# Altium PCB Main.PcbDoc
Units mil, origin at the board's own origin, x right, y up, seen from the top; angles counter-clockwise.
Board outline 2045 x 1510 mil, 2 copper layers (Top Layer, Bottom Layer); 52 components, 47 nets, 215 pads, 79 vias.
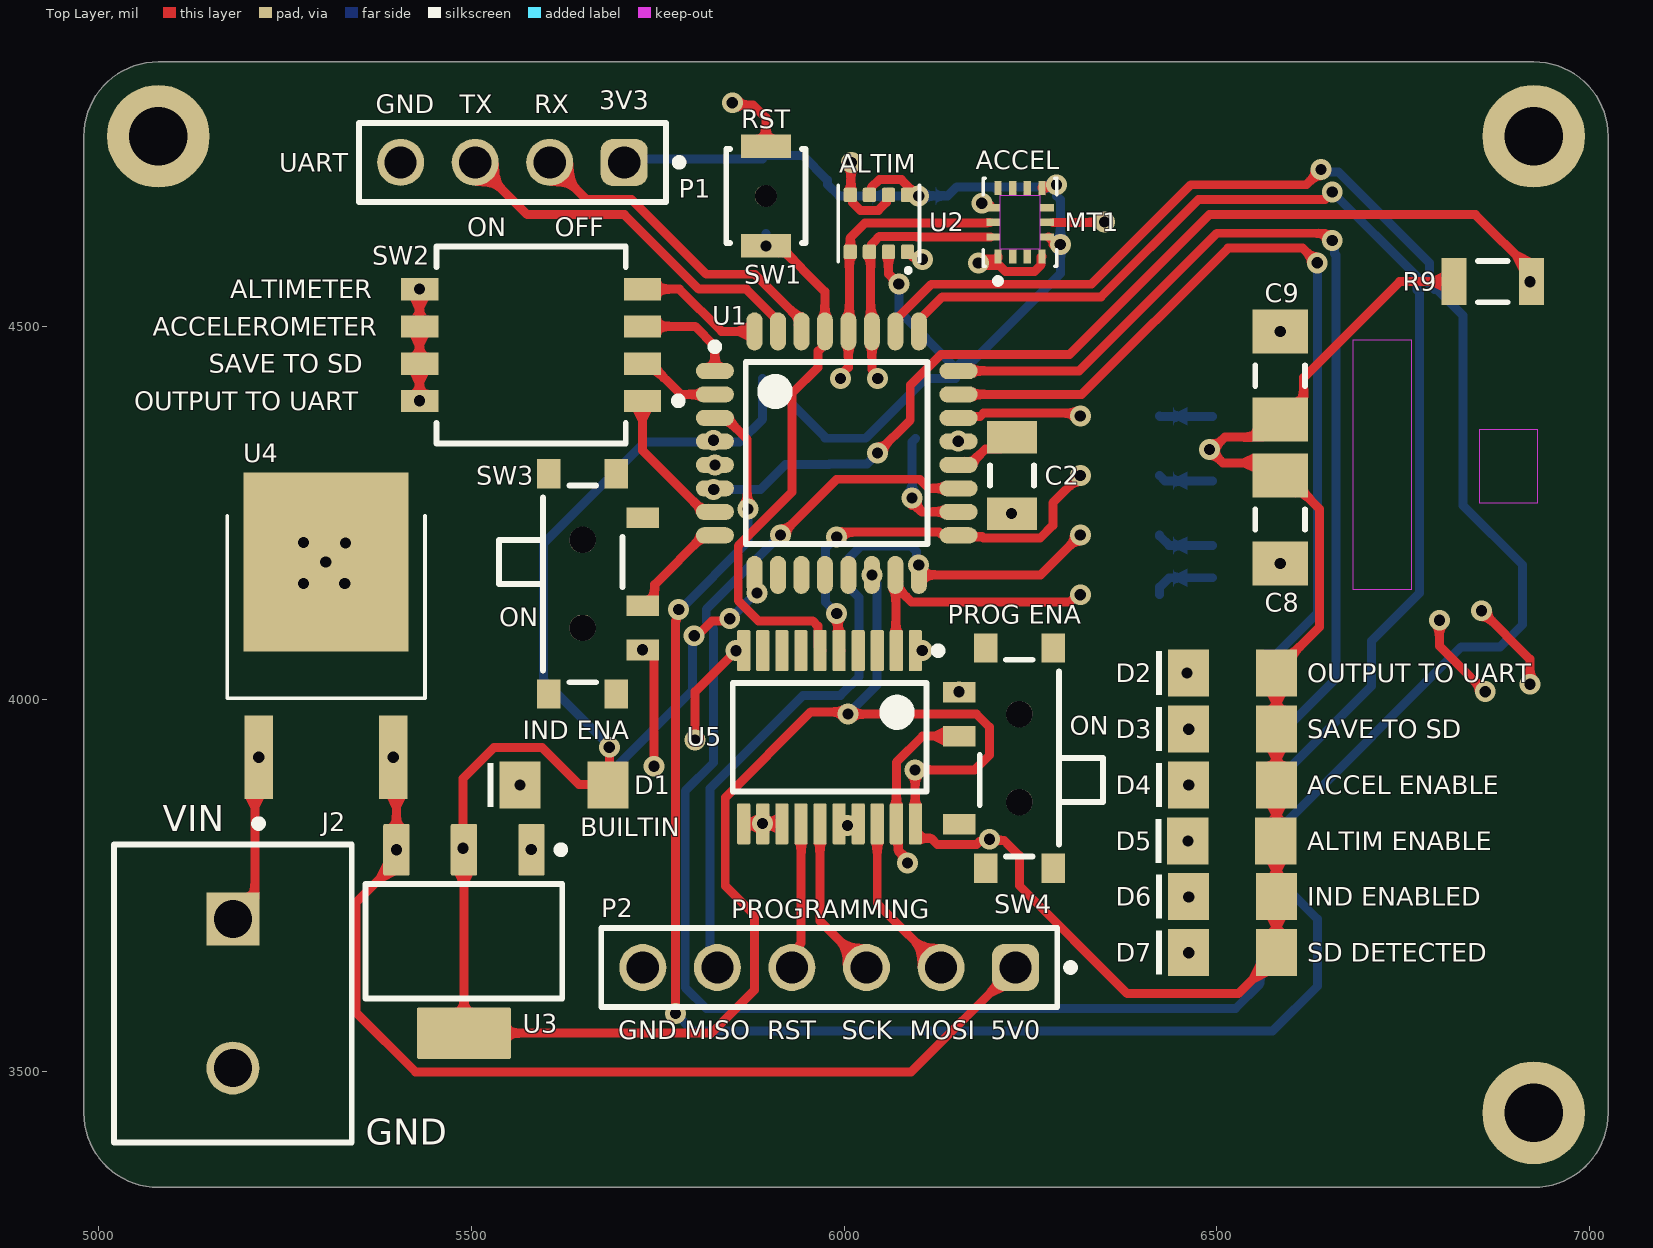
[diagram p0: Top Layer view]
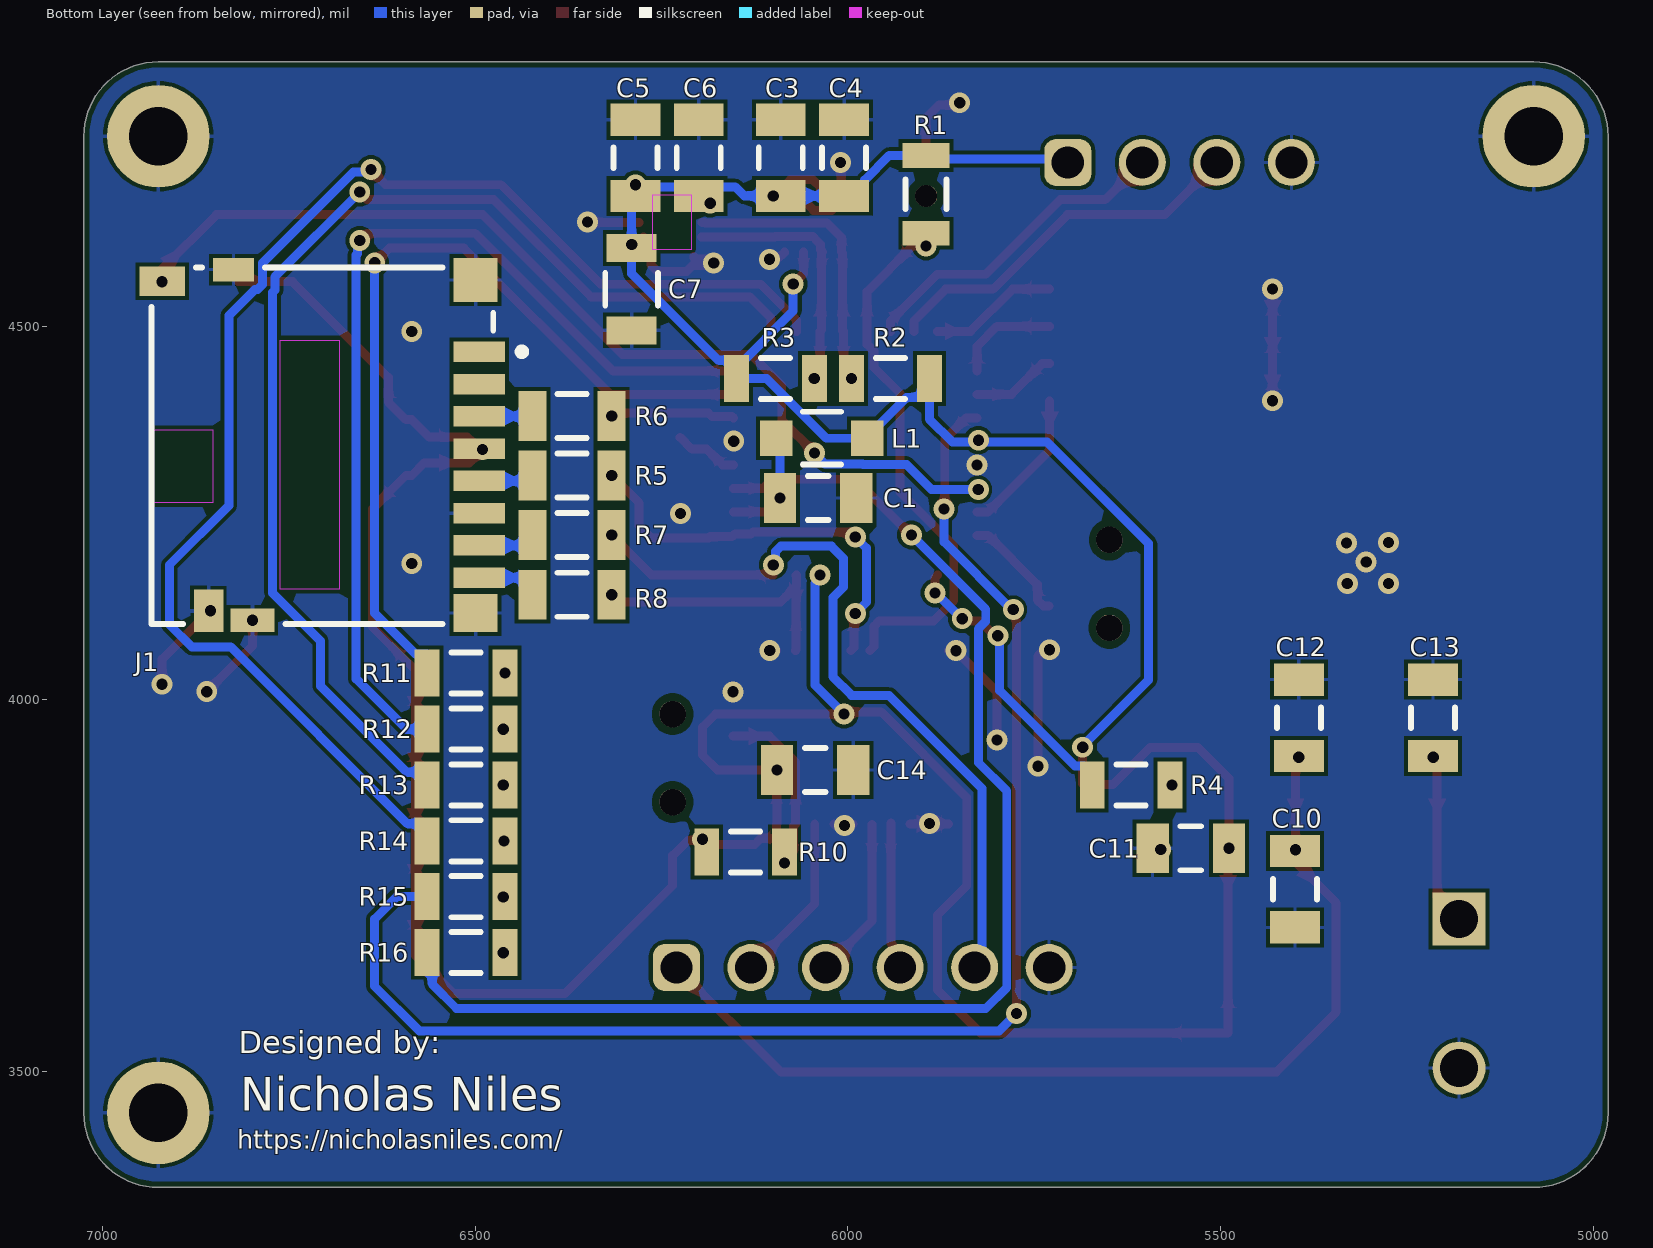
[diagram p1: Bottom Layer view, seen from below]
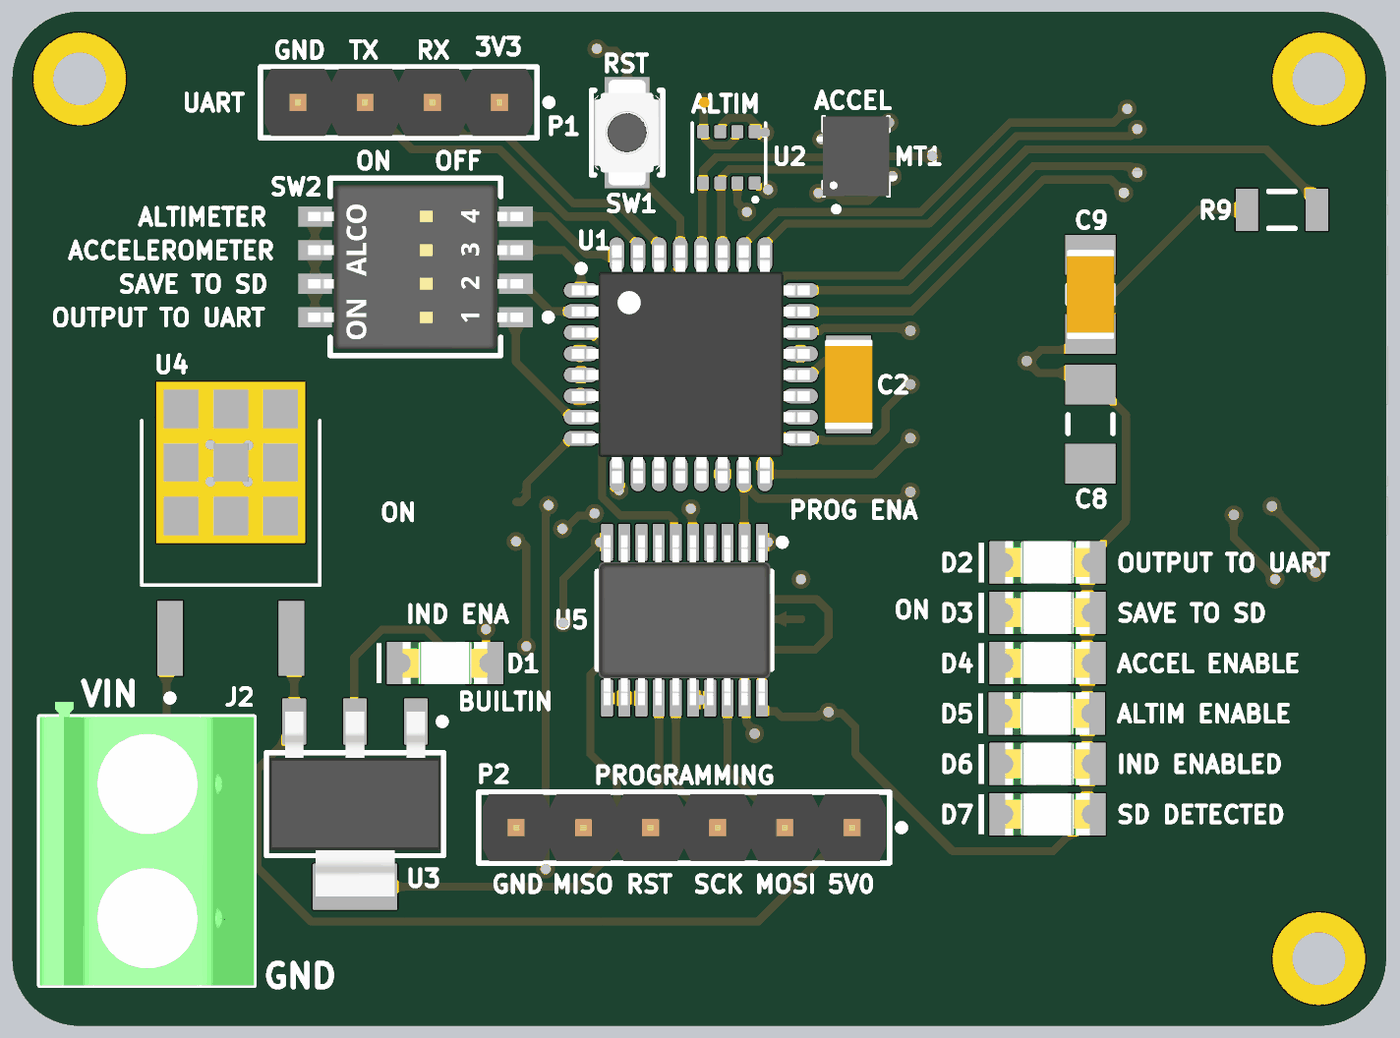
[diagram p2: 3D render of the assembled board from above, using the file's embedded part models]

## Layer stack, top to bottom
Top Solder: solder mask 0.4, Solder Resist, Dk 3.5
Top Layer: signal copper 1.4
Dielectric 1: dielectric 12.6, FR-4, Dk 4.8
Bottom Layer: signal copper 1.4
Bottom Solder: solder mask 0.4, Solder Resist, Dk 3.5

## Board outline
4980,3445 4980,4755 cw(c5080,4755) 5080,4855 6925,4855 cw(c6925,4755) 7025,4755 7025,3445 cw(c6925,3445) 6925,3345 5080,3345 cw(c5080,3445)

## Design rules (kind name [scope] priority, off if disabled: settings)
BoardOutlineClearance [All] p1: gap=7.87 ignorepadtopadclearanceinfootprint=FALSE
Clearance [All] p1: gap=5 ignorepadtopadclearanceinfootprint=TRUE except(10: Arc-Hole Track-Hole SMDPad-Hole THPad-Hole Via-Hole Fill-Hole Poly-Hole Region-Hole Text-Hole)
ComponentClearance [All] p1: gap=5 collisioncheckmode=3 verticalgap=5 showdistances=TRUE
DiffPairsRouting [All] p1: maxlimit=10 minlimit=5 mostfreqgap=5 toplayer_minwidth=5 toplayer_maxwidth=1000 toplayer_prefwidth=5 bottomlayer_minwidth=5 bottomlayer_maxwidth=1000 bottomlayer_prefwidth=5 maxuncoupledlength=500
Height [All] p1: minheight=0 maxheight=71497.94 prefheight=500
HoleSize [All] p1: absolutevalues=TRUE maxlimit=248.03 minlimit=11.81 maxpercent=80.000 minpercent=20.000
HoleToHoleClearance [All] p1: gap=10 allowstackedmicrovias=FALSE
MinimumAnnularRing [All] p1: minimumring=6
MinimumSolderMaskSliver [All] p1: minsoldermaskwidth=6
PlaneClearance [All] p1: clearance=5
PlaneConnect PlaneConnectPowerPads [InPadClass('PowerPads')] p1: planeconnectstyle=Direct reliefexpansion=20 reliefentries=4 reliefconductorwidth=10 reliefairgap=10
PlaneConnect [All] p2: pad.planeconnectstyle=Relief pad.reliefexpansion=11.81 pad.reliefentries=4 pad.reliefconductorwidth=5 pad.reliefairgap=5 via.planeconnectstyle=Direct via.reliefexpansion=11.81 via.reliefentries=4 via.reliefconductorwidth=5 via.reliefairgap=5
PolygonConnect PolygonConnectPowerPads [All vs (InPadClass('PowerPads'))] p1: connectstyle=Direct reliefconductorwidth=10 reliefentries=4 polygonreliefangle="90 Angle" airgapwidth=10
PolygonConnect [All] p2: thpad.connectstyle=Relief thpad.reliefconductorwidth=5 thpad.reliefentries=4 thpad.polygonreliefangle="90 Angle" thpad.airgapwidth=5 smdpad.connectstyle=Relief smdpad.reliefconductorwidth=5 smdpad.reliefentries=4 smdpad.polygonreliefangle="90 Angle" smdpad.airgapwidth=5 via.connectstyle=Direct via.reliefconductorwidth=5 via.reliefentries=4 via.polygonreliefangle="90 Angle" via.airgapwidth=5
RoutingVias [All] p1: holewidth=11.81 width=23.62 viastyle="Through Hole" minholewidth=11.81 minwidth=23.62 maxholewidth=23.62 maxwidth=259.84
SilkToSilkClearance [All] p1: silktosilkclearance=5
SilkToSolderMaskClearance [IsPad] p1: minsilkscreentomaskgap=5 clearancetoexposedcopper=TRUE
SolderMaskExpansion [All] p1: expansion=2 istentingtop=FALSE
SupplyNets "Schematic Supply Nets_2" [InNet('5V0')] p1: voltage=0.000
SupplyNets "Schematic Supply Nets_3" [InNet('VIN')] p2: voltage=0.000
SupplyNets "Schematic Supply Nets_1" [InNet('3V3')] p3: voltage=0.000
SupplyNets "Schematic Supply Nets" [InNet('GND')] p4: voltage=0.000
UnRoutedNet [All] p1: checkbadconnections=TRUE
Width Width_10mil [All] p1: maxlimit=1000 minlimit=12 preferedwidth=12 minimp=50.000000 maximp=50.000000 favimp=50.000000
Width Width_6mil [All] p2: maxlimit=1000 minlimit=6 preferedwidth=6 minimp=50.000000 maximp=50.000000 favimp=50.000000
Width Power_20mil [All] p3: maxlimit=1000 minlimit=20 preferedwidth=20 minimp=50.000000 maximp=50.000000 favimp=50.000000
Width Power_12mil [All] p4: maxlimit=1000 minlimit=12 preferedwidth=12 minimp=50.000000 maximp=50.000000 favimp=50.000000
Width Width_5mil [All] p5: maxlimit=1000 minlimit=5 preferedwidth=5 minimp=50.000000 maximp=50.000000 favimp=50.000000
19 further rules are at their usual default settings.

## Classes and differential pairs
component class Power: C10 C11 C12 C13 J2 U3 U4
component class Indicators: D2 D4 D6 D7 R14 R16
component class Config: SW2 SW3 SW4
component class MicroSD: C8 C9 J1 R6 R8 R10
component class Microcontroller: C1 C2 D2 L1 P1 R1 R2 R3 R6 SW1 U1
component class LevelShifter: C14 P2 R10 U5
component class Altimeter: C3 C4 U2
component class Accelerometer: C5 C6 C7 MT1

## Components (designator, comment, footprint, x,y, rotation, side; value= is the part's Value field where it differs from the comment)
C1 "0.1µF" CAPC3216X100X50LL20T25 6040,4270 r0 bottom
C2 "0.1µF" CAPC3216X100X50LL20T25 6225,4300 r270 top
C3 "0.1µF" CAPC3216X100X50LL20T25 6090,4726.18 r90 bottom
C4 "0.1µF" CAPC3216X100X50LL20T25 6005,4726.18 r90 bottom
C5 "2.2µF" CAPC3216X180X50LL20T25 6285,4726.18 r270 bottom
C6 "0.1µF" CAPC3216X100X50LL20T25 6200,4726.18 r270 bottom
C7 "10nF" FP-C1206C-EB-MFG 6290,4549.88 r270 bottom value="10,000 pF"
C8 "10µF" CAPC3216X180X50ML20T25 6585,4240.94 r90 top
C9 "0.1µF" CAPC3216X100X50ML20T25 6585,4434.06 r270 top
C10 "1µF" CAPC3216X110X50LL20T25 5400,3745 r90 bottom
C11 "1µF" CAPC3216X110X50LL20T25 5540,3800 r180 bottom
C12 "1µF" CAPC3216X110X50LL20T25 5395,3975 r270 bottom
C13 "1µF" CAPC3216X110X50LL20T25 5215,3975 r270 bottom
C14 "0.1µF" CAPC3216X100X50LL20T25 6043.82,3905 r180 bottom
D1 "150120GS75000" WL-SMCW_1206_150120xx75000 5624.06,3885 r0 top
D2 "150120GS75000" WL-SMCW_1206_150120xx75000 6520.94,4035 r0 top
D3 "150120GS75000" WL-SMCW_1206_150120xx75000 6520.94,3960 r0 top
D4 "150120GS75000" WL-SMCW_1206_150120xx75000 6520.94,3885 r0 top
D5 "150120GS75000" WL-SMCW_1206_150120xx75000 6520,3810 r0 top
D6 "150120GS75000" WL-SMCW_1206_150120xx75000 6520.94,3735 r0 top
D7 "150120GS75000" WL-SMCW_1206_150120xx75000 6520.94,3660 r0 top
J1 "DM3D-SF" FP-DM3D-SF-MFG 6705,4340 r90 bottom
J2 "1729128" PHOE-1729128-2_V 5180,3605 r270 top
L1 "10µH" WE-MI_1206_L3.2W1.6H1.1 6035,4350 r180 bottom
MT1 "ICM-42670-P" XDCR_ICM-42670-P 6235.93,4639.69 r90 top
P1 "61300411121" 61300411121 5555,4720 r180 top
P2 "61300611121" 61300611121 5980,3640 r180 top
R1 "10kΩ" RESC3116X65X40LL10T20 5895,4677.17 r90 bottom
R2 "10kΩ" RESC3116X65X40LL10T20 5942.83,4430 r180 bottom
R3 "10kΩ" RESC3116X65X40LL10T20 6097.17,4430 r0 bottom
R4 "1kΩ" RESC3116X65X40LL10T20 5620,3885 r180 bottom
R5 "33Ω" RESC1206(3216)_L 6370,4300 r180 bottom value="33.00 Ohm"
R6 "33Ω" RESC1206(3216)_L 6370,4380 r180 bottom value="33.00 Ohm"
R7 "33Ω" RESC1206(3216)_L 6370,4220 r180 bottom value="33.00 Ohm"
R8 "33Ω" RESC1206(3216)_L 6370,4140 r180 bottom value="33.00 Ohm"
R9 "10kΩ" RESC3116X65X40LL10T20 6870,4560 r180 top
R10 "10kΩ" RESC3116X65X40LL10T20 6137.17,3795 r0 bottom
R11 "1kΩ" RESC3116X65X40LL10T20 6512.17,4035 r180 bottom
R12 "1kΩ" RESC3116X65X40LL10T20 6512.17,3960 r180 bottom
R13 "1kΩ" RESC3116X65X40LL10T20 6512.17,3885 r180 bottom
R14 "1kΩ" RESC3116X65X40LL10T20 6512.17,3810 r180 bottom
R15 "1kΩ" RESC3116X65X40LL10T20 6512.17,3735 r180 bottom
R16 "1kΩ" RESC3116X65X40LL10T20 6512.17,3660 r180 bottom
SW1 "RST" FP-B3U-1000P-B-MFG 5895,4675 r90 top
SW2 "1571983-4" FP-1571983-4-MFG 5580,4475 r90 top
SW3 "450404015514" 450404015514 -44350.71,54154.53 r90 top
SW4 "450404015514" 450404015514 56235,-46079.06 r270 top
U1 "ATMEGA328PB-AU" ATML-32A_L 5990,4330 r0 top
U2 "BME280" PSON65P250X250X100-8N 6046.61,4638.19 r270 top
U3 "TLV1117LV33DCYR" DCY0004A_N 5490,3675 r270 top
U4 "VIN->5V0" DPAK229P990X238-4N 5305,4085 r0 top
U5 "SN74LVC245APWRG3" PW0020A_N 5980.43,3948.86 r270 top

## Footprints (in the part's own frame and the unit in brackets; to place one, negate y for a bottom-side part, rotate by r counter-clockwise, add the part's x,y. Pads: shape width x height; smd on the part's side, far side on the other; paste and mask are expansions set on the pad)
61300411121 [mm] "Pin Header, pitch 2.54 mm, THT, Vertical, single row, 4p"
  rrect50% 1.6x1.6 hole 1.1: 1(-3.81,0)
  round 1.6 hole 1.1: 2(-1.27,0) 3(1.27,0) 4(3.81,0)
  silkscreen extent -5.8,-1.35 5.23,1.35, body extent -5.08,-1.27 5.08,1.27, height 8.57
61300611121 [mm] "Pin Header, pitch 2.54 mm, THT, Vertical, single row, 6p"
  rrect50% 1.6x1.6 hole 1.1: 1(-6.35,0)
  round 1.6 hole 1.1: 2(-3.81,0) 3(-1.27,0) 4(1.27,0) 5(3.81,0) 6(6.35,0)
  silkscreen extent -8.34,-1.35 7.77,1.35, body extent -7.62,-1.27 7.62,1.27, height 8.57
450404015514 [mm] "Right angle Slide Switch"
  rect 0.7x1.1 smd: COM(-1270.75,-1272.05) L1(-1267.75,-1272.05) L2(-1272.25,-1272.05)
  round 0.9 hole 0.9 unplated: M1(-1271.5,-1270) M2(-1268.5,-1270)
  rect 1x0.8 smd: M3(-1273.75,-1268.85) M4(-1266.25,-1268.85) M5(-1273.75,-1271.15) M6(-1266.25,-1271.15)
  silkscreen extent -1273.35,-1271.35 -1266.65,-1267.15, body extent -1273.85,-1272.25 -1266.15,-1267.12, height 1.4
ATML-32A_L [mm] "TQFP, 32-Leads, Body 7x7mm, Pitch 0.8mm, IPC High Density"
  oval 1.3x0.55 smd: 1(-4.15,2.8) 2(-4.15,2) 3(-4.15,1.2) 4(-4.15,0.4) 5(-4.15,-0.4) 6(-4.15,-1.2) 7(-4.15,-2) 8(-4.15,-2.8) 17(4.15,-2.8) 18(4.15,-2) 19(4.15,-1.2) 20(4.15,-0.4) 21(4.15,0.4) 22(4.15,1.2) 23(4.15,2) 24(4.15,2.8)
  oval 0.55x1.3 smd: 9(-2.8,-4.15) 10(-2,-4.15) 11(-1.2,-4.15) 12(-0.4,-4.15) 13(0.4,-4.15) 14(1.2,-4.15) 15(2,-4.15) 16(2.8,-4.15) 25(2.8,4.15) 26(2,4.15) 27(1.2,4.15) 28(0.4,4.15) 29(-0.4,4.15) 30(-1.2,4.15) 31(-2,4.15) 32(-2.8,4.15)
  silkscreen extent -4.27,-3.1 3.1,3.75, body extent -4.5,-4.5 4.5,4.5, height 1.2
CAPC3216X100X50LL20T25 [mm] "Chip Capacitor, 2-Leads, Body 3.4x1.8mm, IPC High Density"
  rect 1.1x1.7 smd: 1(-1.3,0) 2(1.3,0)
  silkscreen extent -0.35,-0.75 0.35,0.75, body extent -1.7,-0.9 1.7,0.9, height 1
CAPC3216X100X50ML20T25 [mm] "Chip Capacitor, 2-Leads, Body 3.4x1.8mm, IPC Low Density"
  rect 1.5x1.9 smd: 1(-1.5,0) 2(1.5,0)
  silkscreen extent -0.35,-0.85 0.35,0.85, body extent -1.7,-0.9 1.7,0.9, height 1
CAPC3216X110X50LL20T25 [mm] "Chip Capacitor, 2-Leads, Body 3.20x1.60mm, IPC High Density"
  rect 1.1x1.7 smd: 1(-1.3,0) 2(1.3,0)
  silkscreen extent -0.35,-0.75 0.35,0.75, body extent -1.7,-0.9 1.7,0.9, height 1.1
CAPC3216X180X50LL20T25 [mm] "Chip Capacitor, 2-Leads, Body 3.20x1.60mm, IPC High Density"
  rect 1.1x1.7 smd: 1(-1.3,0) 2(1.3,0)
  silkscreen extent -0.35,-0.75 0.35,0.75, body extent -1.7,-0.9 1.7,0.9, height 1.8
CAPC3216X180X50ML20T25 [mm] "Chip Capacitor, 2-Leads, Body 3.40x1.80mm, IPC Low Density"
  rect 1.5x1.9 smd: 1(-1.5,0) 2(1.5,0)
  silkscreen extent -0.35,-0.85 0.35,0.85, body extent -1.7,-0.9 1.7,0.9, height 1.8
DCY0004A_N [mm] "SOT223, 4-Leads, Body 6.7x3.7mm, Pitch 2.3mm, IPC Medium Density"
  rrect11% 1.75x0.9 smd: 1(-3.125,2.3) 2(-3.125,0) 3(-3.125,-2.3)
  rrect6% 1.75x3.2 smd: 4(3.125,0)
  silkscreen extent -3.25,-3.35 1.95,3.43, body extent -3.5,-3.25 3.5,3.25, height 1.62
DPAK229P990X238-4N [mm]
  rect 0.97x2.83 smd: 1(-2.29,-4.14) 3(2.29,-4.14)
  rect 5.63x6.09 smd paste-4: 2(0,2.51)
  silkscreen extent -3.37,-6.5 3.37,4.09
FP-1571983-4-MFG [mm]
  rect 0.76x1.27 smd paste+0 mask+0: 1(-1.905,-3.795) 2(-0.635,-3.795) 3(0.635,-3.795) 4(1.905,-3.795) 5(1.905,3.795) 6(0.635,3.795) 7(-0.635,3.795) 8(-1.905,3.795)
  silkscreen extent -3.35,-5.15 3.35,3.22, body extent -3.45,-4.53 3.45,4.53, height 0.25
FP-B3U-1000P-B-MFG [mm]
  rect 0.8x1.7 smd paste+0 mask+0: 1(-1.7,0) 2(1.7,0)
  round 0.75 hole 0.75 unplated paste-2539.97 mask+0: ""(0,0)
  silkscreen extent -1.6,-1.35 1.6,1.35, body extent -2.2,-1.45 2.2,1.45, height 0.25
FP-C1206C-EB-MFG [mm]
  rect 0.95x1.7 smd paste+0 mask+0: 1(-1.4,0) 2(1.4,0)
  silkscreen extent -0.55,-0.9 0.55,0.9, body extent -1.6,-0.8 1.6,0.8, height 0.88
FP-DM3D-SF-MFG [mm]
  rect 0.7x1.75 smd paste+0 mask+0: 1(3.2,-5.35) 2(2.1,-5.35) 3(1,-5.35) 4(-0.1,-5.35) 5(-1.2,-5.35) 6(-2.3,-5.35) 7(-3.4,-5.35) 8(-4.5,-5.35)
  rect 1x1.55 smd paste+0 mask+0: 9(5.6,5.45)
  rect 1.45x1 smd paste+0 mask+0: 10(-5.625,3.875)
  rect 0.8x1.4 smd paste+0 mask+0: 11(6,3.025)
  rect 0.8x1.5 smd paste+0 mask+0: 12(-5.95,2.375)
  rect 1.3x1.5 smd paste+0 mask+0: 13(-5.7,-5.225)
  rect 1.5x1.5 smd paste+0 mask+0: 14(5.65,-5.225)
  Keep-Out Layer region: -4.9,1.425 3.6,1.425 3.6,-0.575 -4.9,-0.575
  Keep-Out Layer region: -1.952,5.726 0.548,5.726 0.548,3.726 -1.952,3.726
  silkscreen extent -6.07,-6.92 6.07,5.82, body extent -6.72,-5.91 7.08,8.19, height 1.95
PHOE-1729128-2_V [mm] "Receptacle, 2-Leads, Body 8.1x10.16mm, Pitch 5.08mm"
  rect 1.8x1.8 hole 1.3: 1(-2.54,0)
  round 1.8 hole 1.3: 2(2.54,0)
  silkscreen extent -5.08,-4.05 5.08,4.05, body extent -5.65,-4.05 5.08,4.05, height 10.01
PSON65P250X250X100-8N [mm]
  rrect25% 0.49x0.45 smd: 1(0.97,0.975) 2(0.97,0.325) 3(0.97,-0.325) 4(0.97,-0.975) 5(-0.97,-0.975) 6(-0.97,-0.325) 7(-0.97,0.325) 8(-0.97,0.975)
  silkscreen extent -1.3,-1.39 1.65,1.39
PW0020A_N [mm] "SOP, 20-Leads, Body 6.6x4.5mm, Pitch 0.65mm, IPC Medium Density"
  rrect22% 1.4x0.45 smd: 1(-2.95,2.925) 2(-2.95,2.275) 3(-2.95,1.625) 4(-2.95,0.975) 5(-2.95,0.325) 6(-2.95,-0.325) 7(-2.95,-0.975) 8(-2.95,-1.625) 9(-2.95,-2.275) 10(-2.95,-2.925) 11(2.95,-2.925) 12(2.95,-2.275) 13(2.95,-1.625) 14(2.95,-0.975) 15(2.95,-0.325) 16(2.95,0.325) 17(2.95,0.975) 18(2.95,1.625) 19(2.95,2.275) 20(2.95,2.925)
  silkscreen extent -3.07,-3.3 1.85,3.83, body extent -3.21,-3.25 3.21,3.25, height 1
RESC1206(3216)_L [mm] "Chip Resistor, Body 3.2x1.6mm, IPC High Density"
  rect 0.95x1.7 smd: 1(-1.35,0) 2(1.35,0)
  silkscreen extent -0.5,-0.75 0.5,0.75, body extent -1.67,-0.87 1.67,0.87, height 0.75
RESC3116X65X40LL10T20 [mm] "Chip Resistor, 2-Leads, Body 3.10x1.60mm, IPC High Density"
  rect 0.85x1.6 smd: 1(-1.325,0) 2(1.325,0)
  silkscreen extent -0.5,-0.7 0.5,0.7, body extent -1.6,-0.85 1.6,0.85, height 0.65
WE-MI_1206_L3.2W1.6H1.1 [mm] "SMD Multilayer Inductor, body 3.2x1.6mm"
  rect 1.1x1.2 smd: 1(-1.55,0) 2(1.55,0)
  silkscreen extent -0.65,-0.9 0.65,0.9, body extent -1.6,-0.8 1.6,0.8, height 1.1
WL-SMCW_1206_150120xx75000 [mm] "SMD Mono-color Chip LED, body 3.2x1.6mm"
  rect 1.4x1.6 smd: 1(-1.5,0) 2(1.5,0)
  silkscreen extent -2.6,-0.75 -2.4,0.75, body extent -1.6,-0.8 1.6,0.8, height 0.68
XDCR_ICM-42670-P [mm]
  rect 0.475x0.25 smd paste-1 mask+0.05: 1(-1.162,0.75) 2(-1.162,0.25) 3(-1.162,-0.25) 4(-1.162,-0.75) 8(1.162,-0.75) 9(1.162,-0.25) 10(1.162,0.25) 11(1.162,0.75)
  rect 0.25x0.475 smd paste-1 mask+0.05: 5(-0.5,-0.913) 6(0,-0.913) 7(0.5,-0.913) 12(0.5,0.913) 13(0,0.913) 14(-0.5,0.913)
  Keep-Out Layer region: 0.925,-0.675 -0.925,-0.675 -0.925,0.675 0.925,0.675
  silkscreen extent -2.1,-1.25 1.5,1.25, body extent -1.5,-1.25 1.5,1.25, height 0.81

## Part data
C1 C2 C3 C4 C6 C9 C14: library part CMP-1664-00001-4, "Chip Capacitor, 100 nF, +/- 10%, 25 V, -55 to 125 degC, 1206 (3216 Metric), RoHS, Tape and Reel", Manufacturer=Kemet, Max Operating Temperature="125 degC", Min Operating Temperature="-55 degC", Package Quantity=4000, Voltage Rating="25 V", ComponentLink1Description="Manufacturer URL", ComponentLink1URL=http://www.kemet.com/, ComponentLink2Description=Datasheet, ComponentLink2URL=http://www.kemet.com/docfinder?Partnumber=C1206F104K3RACTU, DatasheetVersion=02/2016, Height="0.78 mm", Length="3.2 mm", Mounting Technology="Surface Mount", PackageDescription="2-Pin Surface Mount Device, Body 3.2 x 1.6 mm", PackageReference=1206, Packaging="Tape and Reel", REACH SVHC="No SVHC", RoHSCompliant=true
C5: library part CMP-1037-04831-2, "Chip Capacitor, 2.2 uF, +/- 10%, 50 V, -55 to 125 degC, 1206 (3216 Metric), RoHS, Tape and Reel", Capacitance=2.2uF, Capacitance - nF=2200nF, Case Code - in=1206, Case Code - mm=3216, Case Height=1.6mm, Case Length=3.2mm, Dielectric=X7R, Manufacturer=Kemet, Maximum Operating Temperature=+125C, Minimum Operating Temperature=-55C, Operating Temperature Range=-55Cto+125C, Package / Case=1206(3216metric), Package Description="2-Pin Surface Mount Device, Body 3.2 x 1.6 mm", Temperature Coefficient / Code=+/-15%, Tolerance=10%, Voltage Rating=50V, Brand=Kemet, Case Width=1.6mm, Class=Class1, Datasheet URL=http://www.kemet.com/docfinder?Partnumber=C1206C225K5RACTU, Datasheet Version=02/2016, Dimensions=1.6mmWx3.2mmLx1.6mmH, Factory Pack Quantity=2000, Manufacturer URL=http://www.kemet.com/, Mounting Technology=SurfaceMount, Package Reference=1206, Packaging=Reel, Product=GeneralTypeMLCCs, Product Category=MultilayerCeramicCapacitorsMLCC-SMD/SMT, RoHS=Details, Series=C1206C, Termination Style=SMD/SMT, Type=SMDMLCCX7R6.3-250VDCCommericalGrade, Voltage Rating DC=50V
C7: library part CMP-03020-003656-1, "CAP CER 10000PF 100V X7R 1206", Capacitance="10,000 pF", Manufacturer=KEMET, Manufacturer Part Number=C1206C103J1RACTU, Package=C1206C-EB, Temperature="-55°C to +150°C", Temperature Characteristic=X7R, Temperature Coefficient=15%, Temperature Range High=+150°C, Temperature Range Low=-55°C, Tolerance=0.05, Voltage Rating="100 V", Automotive=Yes, Automotive Grade="Grade 0", Category=Cap, ComponentLink2Description=Datasheet, ComponentLink2URL=https://content.kemet.com/datasheets/KEM_C1007_X8R_ULTRA_150C_SMD.pdf, Device Class L1="Passive Components", Device Class L2=Capacitors, Device Class L3="Ceramic Capacitors", Digikey Description="CAP CER 10000PF 100V X7R 1206", Height=0.88mm, Ipc Land Pattern Name=CAPC320160X78, Lead Free=Yes, Material=Ceramic, Mouser Description="1206 C 10nF Ceramic Multilayer Capacitor, 100 VDC, +125degC, X7R Dielec, +/-5%", Octopart=https://octopart.com/c1206c103j1ractu-kemet-121270, RoHS=TRUE
C8: library part CMP-1664-00006-1, "CAP, Ceramic, 10 uF, +/- 10%, 16 V, -55 to 125 degC, 1206 (3216 Metric), RoHS, Tape and Reel", Capacitance="8.2 pF", Case Code (Imperial)=0603, Case Code (Metric)=1608, Max Operating Temperature="125 degC", Min Operating Temperature="-55 degC", Package Quantity=4000, Tolerance=5%, Type (Capacitors)=C0G, Voltage Rating="50 V", Case\Package=0603, ComponentLink1Description="Manufacturer URL", ComponentLink1URL=http://www.kemet.com/, ComponentLink2Description=Datasheet, ComponentLink2URL=http://capacitoredge.kemet.com/capedge2/DataSheet/Datasheet-C1206C106K4RACTU.pdf?pn=C1206C106K4RACTU, DatasheetVersion=Aug-16, Height="0.8 mm", Length="1.6 mm", Mount="Surface Mount", PackageDescription="2-Pin Surface Mount Device, Body 3.2 x 1.6 mm", PackageReference=1206, Packaging="Tape and Reel", Pins=2, Radiation Hardening=No, REACH SVHC="No SVHC", RoHSCompliant=true, Voltage Rating (DC)="50 V", Width="0.8 mm"
C10 C11 C12 C13: library part CMP-2000-06011-1, "Chip Capacitor, 1 uF, +/- 10%, 50 V, -55 to 125 degC, 1206 (3216 Metric), RoHS, Tape and Reel", Capacitance=1uF, Capacitance - nF=1000nF, Case Code - in=1206, Case Code - mm=3216, Case Height=1mm, Case Length=3.2mm, Case Width=1.6mm, Dielectric=X7R, Manufacturer=Kemet, Maximum Operating Temperature=+125C, Minimum Operating Temperature=-55C, Operating Temperature Range=-55Cto+125C, Package / Case=1206(3216metric), Package Description="2-Pin Surface Mount Device, Body 3.2 x 1.6 mm", Temperature Coefficient / Code=+/-15%, Tolerance=10%, Voltage Rating=50V, Brand=Kemet, Class=Class1, Datasheet URL=http://www.kemet.com/docfinder?Partnumber=C1206C105K5RACTU, Datasheet Version=02/2016, Dimensions=1.6mmWx3.2mmLx1mmH, Factory Pack Quantity=2500, Manufacturer URL=http://www.kemet.com/, Mounting Technology=SurfaceMount, Package Reference=1206, Packaging=Reel, Product=GeneralTypeMLCCs, Product Category=MultilayerCeramicCapacitorsMLCC-SMD/SMT, RoHS=Details, Series=C1206C, Termination Style=SMD/SMT, Type=SMDMLCCX7R6.3-250VDCCommericalGrade, Voltage Rating DC=50V
D1 D2 D3 D4 D5 D6 D7: library part CMP-1426-00014-4, "WL-SMCW SMT Mono-Color Chip LED Waterclear", Case Code (Imperial)=1206, Case Code (Metric)=3216, Color=Green, Forward Current=100mA, Forward Voltage=3.2V, Max Junction Temperature (Tj)=95°C, Max Operating Temperature=85°C, Max Reverse Voltage (DC)=5V, Min Operating Temperature=-40°C, Power Dissipation=105mW, Test Current=20mA, Case/Package=1206, Dominant Wavelength=525nm, Height=680µm, Length=3.2mm, Lens Style="Clear, Rectangular", Luminous Intensity=450mcd, Mount="Surface Mount", Packaging="Tape and Reel", Peak Wavelength=515nm, REACH SVHC=Unknown, Reverse Voltage=5V, RoHS=Compliant, Viewing Angle=140°, Wavelength=525nm, Width=1.6mm
J1: library part CMP-2000-06166-2, "CONN MICRO SD CARD PUSH-PULL", Contact Resistance=100mR, Current Rating=500mA, Flammability Rating="UL94 V-0", Insulation Resistance=1GR, Max Operating Temperature=85°C, Max Voltage Rating (AC)=125V, Min Operating Temperature=-25°C, Package Quantity=1, Connector Type=Connector, Contact Material="Copper Alloy", Contact Plating=Gold, Depth=11.45mm, Gender=Female, Housing Material=Polymer, Lead Free="Lead Free", Length=11.95mm, Max Current Rating=500mA, Mount="Surface Mount", Number Of Contacts=8, Number of Rows=1, Orientation="Right Angle", Packaging="Tape and Reel", Pitch=1.1mm, Radiation Hardening=No, REACH SVHC="No SVHC", Termination=Solder, Voltage Rating (AC)=125V, Width=11.95mm
J2: library part CMP-2000-05815-1, "PCB Terminal Block, 13.5 A, 400 V, 2-Pin THD, RoHS, Bulk", Current Rating=13500mA, Manufacturer="Phoenix Contact", Package Description="2-Pin Through Hole Device, Body 8.1 x 10.16 mm, Pitch 5.08 mm", Package Reference=1729128-2, Package Version=03/2015, Voltage Rating=400V, Datasheet URL=https://datasheet.ciiva.com/16046/1729128-16046181.pdf, Datasheet Version=12/2013, Manufacturer URL=http://www.phoenixcontact.com/, Mounting Technology=ThroughHole, No. of Positions=2, No. of Rows=1, Orientation=Horizontal, Package URL=https://www.phoenixcontact.com/online/portal/pi/pxc/product_detail_page/!ut/p/b1/3VdJjqNKFDxLH8AFycySyWY2ozFsEPOMMQaDOX1XedGL_1Vdm5YXJleknhSKeBkvI6EA8ncAo3AYoDhBQGco6KN7VURTdemj9us_IEKEZo_YHiPAEWEFmDGOHMORkqKYCORBZxgL7ZoaZYcbFFUZ3fqxSY6GOuxydWUuHqz1ynmMFygu583Bob0Ewr6Sd_l-5m-kAueHiB0jpRwZwe58wwtkpxtMYd_LmGcDRU02dRNEyWt6Y2ti5pSyJ_reIkzIulrqApdnbT11V5jnCKbYNCvhEM1MCpPByat_X379-iThf08CI5GfOPqfBeS3BRoBOdD55AKVv0iLwCMq-2BrzXWSGRH7pUGD9uwXQjiph3xL0DKQwdGa0JImiIOmBNOestqgwTHSSs2oOep-78apyXQBvNi8ZLaFjvjWvcaUEBu0MC6Wbe-d6mB0FAebo2lUWinqYaZs5DAYzV0RP9yitUjnGJ0iI9xhZkT42OCQNUJJhkgWINNQLP2JFP6OpMg3JCVg70jqHT0lvKOnhHf0lPuOnnLf0VPuWx6_dxwUIvwk5WMkT0kLL1mh61l2yZVSzG3pYV_bqo-mj6uMKwKwdnnW8Jh5RTOJzMOA5c-eJDaZQw4mTMPH02PvS_ZAqNVjVTo2WyYLkwH_KU1mmmG5kjRhDqPXLwwVHvVOjCM60-fpXvTDfMGW1PVFVS1r4e4yVDk4ZdNbkUHvqPqQSeian4UD39fNKmachqdJ1NJbyk8rXT9mXTvPk3oE5meulKGgiruPJek-4I9hTT6G8ZLOyRSm2RRVbThERQad5OS28hdt4YW4vG0stgYYzsWsK4_7y6DZMjJSCqri1kyiZR5vD7pwIrNR7QwPHTcLTI5qT7eRlpHrdGiupYlqQDJ7zy_CND8fWWBoLRXxk1RVcXiBQwbTD4Xi7KL-FuO94t9xaqweXzH, Packing=Bulk, PartNumber=1729128, Pitch=5.08mm, RoHS=TRUE
L1: library part CMP-0221-00030-2, Ambient Temperature Range High=85°C, Ambient Temperature Range Low=-55°C, Case/Package=SMD/SMT, Current Rating=25mA, DC Resistance (DCR)=500mΩ, Inductance Tolerance=10%, Max Operating Temperature=125°C, Self Resonant Frequency=26MHz, Core Material=Ferrite, Depth=1.6mm, Height=1.1mm, Inductance=10µH, Length=3.2mm, Max DC Current=25mA, Min Operating Temperature=-55°C, NexarPartId=23259292, RoHS=Compliant, Shielding=Unshielded, Tolerance=10%, Width=1.6mm
MT1: Package=None, Availability=Unavailable, MP=ICM-42670-P, Price=None
P1: "WR-PHD Pin Header, THT, Vertical, pitch 2.54mm, 1 Row, 4P", Contact Resistance=20mOhm, Manufacturer="Wurth Elektronik", Operating Temperature Max=105°C, Operating Temperature Min=-40°C, Rated Current=3A, Withstanding Voltage=500V, Working Voltage=250V, Category="Board-to-Board Connectors", ComponentLink1Description="Website Link", ComponentLink1URL=https://www.we-online.com/redexpert/article/61300411121?ad, ComponentLink2Description="Datasheet Link", ComponentLink2URL=https://www.we-online.com/redexpert/spec/61300411121?ad, Gender="Pin Header", Manufacturer Part Number=61300411121, Match Code=WR-PHD, Mount="Through Hole", Number of Pins=4, Number of Rows=1, Orientation=Vertical, Packaging=Bag, Pitch=2.54mm
P2: library part CMP-1502-01070-3, Color=Black, Contact Resistance=20mΩ, Current Rating=3A, Max Operating Temperature=105°C, Min Operating Temperature=-40°C, Operating Supply Voltage=250V, Connector Type="Male Pin", Contact Gender=Male, Contact Material=Copper, Contact Mating Length=5.9944mm, Contact Plating=Gold, Gender=Male, Height=8.89mm, Housing Material=PBT, Lead Free="Lead Free", Lead Pitch=2.54mm, Mount="Through Hole", NexarPartId=20084590, Number Of Contacts=6, Number of Pins=6, Number of Positions=6, Number of Rows=1, Orientation=Vertical, Packaging=Bulk, Pitch=2.54mm, REACH SVHC=Unknown, RoHS=Compliant, Termination="Through Hole", Voltage Rating=250V
R1 R2 R3 R9 R10: library part CMP-1014-00623-2, "Chip Resistor, 10 KOhm, +/- 1%, 0.25 W, -55 to 155 degC, 1206 (3216 Metric), RoHS, Tape and Reel", Case Code (Imperial)=1206, Case Code (Metric)=3216, Manufacturer=Yageo, Max Operating Temperature=155degC, Min Operating Temperature=-55degC, Package Description="2-Pin Surface Mount Device, Body 3.1 x 1.6 mm", Package Quantity=5000, Package Reference=1206.0, Power Rating=250mW, Resistance=10KOhm, Temperature Coefficient=100ppm/degreesC, Tolerance=1%, Voltage Rating=200V, Case/Package=1206, Composition=ThickFilm, Datasheet URL=http://www.yageo.com/NewPortal/yageodocoutput?fileName=/pdf/R-Chip/PYu-RC_Group_51_RoHS_L_5.pdf, Datasheet Version="Rev. 5, 10/2016", Depth=1.6mm, Height=0.55mm, Lead Free=LeadFree, Length=3.1mm, Manufacturer URL=http://www.yageo.com/, Military Standard=Not, Packaging=TapeandReel, REACH SVHC=Unknown, RoHSCompliant=true, Termination=SMD/SMT, Width=1.6mm
R4 R11 R12 R13 R14 R15 R16: library part CMP-2100-03678-1, "Chip Resistor, 1 KOhm, +/- 1%, 0.25 W, -55 to 155 degC, 1206 (3216 Metric), RoHS, Tape and Reel", Case Code (Imperial)=1206, Case Code (Metric)=3216, Manufacturer=Yageo, Max Operating Temperature=155degC, Min Operating Temperature=-55degC, Package Description="2-Pin Surface Mount Device, Body 3.1 x 1.6 mm", Package Reference=1206.0, Power Rating=250mW, Resistance=1KOhm, Temperature Coefficient=100ppm/degreesC, Tolerance=1%, Voltage Rating=200V, Case/Package=1206, Composition=ThickFilm, Datasheet URL=http://www.yageo.com/NewPortal/yageodocoutput?fileName=/pdf/R-Chip/PYu-RC_Group_51_RoHS_L_5.pdf, Datasheet Version="Rev. 5, 10/2016", Depth=1.6mm, Height=0.55mm, Lead Free=LeadFree, Length=3.1mm, Manufacturer URL=http://www.yageo.com/, Military Standard=Not, Packaging=TapeandReel, REACH SVHC=Unknown, RoHSCompliant=true, Termination=SMD/SMT
R5 R6 R7 R8: library part CMP-1014-00341-1, "33R 0.25W 1% 1206 (3216 Metric)  SMD", Case-EIA=1206, Case-Metric=3216, Power="0.25 W", Tolerance="1 %", Technology=SMT
SW1: library part CMP-08834-000005-1, "SWITCH TACTILE SPST-NO 0.05A 12V", Ambient Temperature Range High=+70°C, Ambient Temperature Range Low=-25°C, Contact Current Rating=50mA, Contact Resistance=100mΩ, Manufacturer=Omron, Manufacturer Part Number=B3U-1000P-B, Operating Force=1.5N, Package=0, Temperature="-25°C to +70°C", Voltage Rating DC=12V, Automotive=No, Category=Switch, ComponentLink2Description=Datasheet, ComponentLink2URL=https://omronfs.omron.com/en_US/ecb/products/pdf/en-b3u.pdf, Device Class L1=Electromechanical, Device Class L2=Switches, Device Class L3="Tactile Switches", Digikey Description="SWITCH TACTILE SPST-NO 0.05A 12V", Electromechanical Life=200000Cycles, Height=1.75mm, Lead Free=Yes, Mount="Surface Mount", Mouser Description="Tactile Switches Top Actuated with boss w/o ground", Octopart=https://octopart.com/b3u-1000p-b-omron-1057356, RoHS=TRUE, Temperature Range High=+70°C, Temperature Range Low=-25°C, Throw Configuration=SPST-NO
SW2: library part CMP-03400-000014-1, "SWITCH SLIDE DIP SPST 25MA 24V", Contact Current Rating=25mA, Contact Resistance=100mΩ, Manufacturer="TE Connectivity", Temperature="-30°C to +85°C", Temperature Range High=+85°C, Temperature Range Low=-30°C, Voltage Rating DC=24V, Automotive=No, Category=Switch, ComponentLink2Description=Datasheet, ComponentLink2URL=https://www.te.com/commerce/DocumentDelivery/DDEController?Action=showdoc&DocId=Customer+Drawing%7F1571983%7FC6%7Fpdf%7FEnglish%7FENG_CD_1571983_C6.pdf%7F1571983-4, Device Class L1=Electromechanical, Device Class L2=Switches, Device Class L3="DIP Switches", Digikey Description="SWITCH SLIDE DIP SPST 25MA 24V", Electromechanical Life=1000Cycles, Height=2.56mm, Lead Free=Yes, Manufacturer Part Number=1571983-4, Number of Circuits=4, Octopart=https://octopart.com/1571983-4-te+connectivity-46507521, Package=1571983-4, RoHS=TRUE, Standoff Height=0.1mm, Throw Configuration=SPST
SW3 SW4: library part CMP-03913-99472344-1, "450404015514 Slide Switch, 0.3A, 5Vdc, Smd Rohs Compliant: Yes", Current Rating=300mA, Insulation Resistance=100MΩ, Max Operating Temperature=85°C, Min Operating Temperature=-40°C, Voltage Rating=5V, Contact Plating=Silver, NexarPartId=99472344, Packaging="Tape and Reel", RoHS=Compliant
U1: library part CMP-2000-07439-1, "AVR Microcontroller, 1.8 to 5.5 V, 32 KB Flash, 1 KB EEPROM, 2 KB SRAM, -40 to 85 degC, 32-Pin TQFP (32A), RoHS, Tray", Manufacturer=Microchip, Package Description="32-Pin Thin Profile Plastic Quad Flat Package, Body 7 x 7 mm, Pitch 0.8 mm", Package Reference=32A, Datasheet URL=http://ww1.microchip.com/downloads/en/DeviceDoc/40001906A.pdf, Datasheet Version="Rev. A, 04/2017", Manufacturer URL=http://www.microchip.com/, Mounting Technology=SurfaceMount, RoHSCompliant=false
U2: "DIGITAL HUMIDITY, PRESSURE AND TEMPERATURE SENSOR<br>* Digital interface IÂ²C (up to 3.4 MHz) and SPI (3 and 4 wire, up to 10 MHz)* Supply voltage VDD main supply voltage range: 1.71 V to 3.6 V*VDDIO interface voltage range: 1.2 V to 3.6 V<br> Operating range -40â€", Package=None, Availability=Unavailable, MP=BME280, Price=None
U3: library part CMP-0395-00503-2, "Single Output LDO, 1 A, Fixed 3.3 V Output, 2 to 5.5 V Input, 4-pin SOT-223 (DCY), -40 to 125 degC, Green (RoHS & no Sb/Br)", Manufacturer="Texas Instruments", Accuracy(%)=2, Code_JEDEC=TO-261, ComponentLink1Description="Manufacturer URL", ComponentLink1URL=http://www.ti.com/, ComponentLink2Description=Datasheet, ComponentLink2URL=http://www.ti.com/general/docs/lit/getliterature.tsp?genericPartNumber=TLV1117LV33&fileType=pdf, ComponentLink3Description="Package Specification", ComponentLink3URL=http://www.ti.com/litv/pdf/mpds094a, DatasheetVersion=SBVS160A, Eco-Plan="Green (RoHS & no Sb/Br)", Fixed Output Options(V)=3.3, Iout(Max)(A)=1, Iq(Typ)(mA)=0.05, Mounting Technology="Surface Mount", PackageDescription="4-Pin Plastic Small Outline, Body 3.5 x 6.5 mm, Pitch 2.3 mm", PackageReference=DCY0004A, PackageVersion=4202506/B, PartNumber=TLV1117LV33DCYR, SubFamily="Single Channel LDO", Vdo(Typ)(mV)=1200, Vin(Max)(V)=5.5, Vin(Min)(V)=2, Vout Adj(Max)(V)=3.3, Vout Adj(Min)(V)=3.3
U4: library part MC7805BDTRKG, "Linear Voltage Regulator IC 1 Output 1A DPAK", Package="TO-252-3 Freescale Semiconductor", Availability=Unavailable, MF="ON Semiconductor", MP=MC7805BDTRKG, Price=None, SnapEDA_Link=https://www.snapeda.com/parts/MC7805BDTRKG/ON%20Semiconductor/view-part/360207/?ref=snap
U5: library part CMP-1620-00520-2, "Octal Bus Transceiver With 3-State Outputs, PW0020A, LARGE T&R", F @ Nom Voltage(Max)(Mhz)=100, Generic Part Number=SN74LVC245A, ICC @ Nom Voltage(Max)(mA)=0.03, Manufacturer="Texas Instruments", Operating Temperature Range(C)="-40 to 125", Rating=Catalog, tpd @ Nom Voltage(Max)(ns)=12.7,8.3,7.3,6.3, Voltage(Nom)(V)=1.8,2.5,2.7,3.3, Bits(#)=8, Code_JEDEC=MO-153, DatasheetVersion=SCAS218X, Input Type=TTL/CMOS, Output Drive (IOL/IOH)(Max)(mA)=-24/24, Output Type=LVTTL, PackageReference=PW0020A, Schmitt Trigger=No, Technology Family=LVC, VCC(Max)(V)=3.6, VCC(Min)(V)=1.65

## Free pads (board coordinates)
  round 137.79 hole 78.74: 7(5080,4755) 7(6925,3445) 7(6925,4755)

## Via types
v1: diameter 28, hole 15, Top Layer to Bottom Layer, tented both sides, 79 vias

## Nets (pads, with @x,y where several pads share a name; then routed paths per layer and width w, separated by ;. In a path a pad name is that pad's centre, name@x,y a point inside that pad or via, vN(x,y) a via of type N, cw(c..) or ccw(c..) an arc to the next point about the centre after c; other vN are vias at no path point)
3V3: C3.1 C4.1 C5.2 C6.2 C7.1 C8.2 C9.2 C11.2 C14.1 D1.2 D2.2 D3.2 D4.2 D5.2 D6.2 D7.2 J1.4 L1.2 MT1.5 MT1.8 MT1.12 P1.1 R1.2 R2.2 R3.2 R9.2 R10.2 U1.4 U1.14 U2.2 U2.6 U2.8 U3.2 U3.4 U5.20 | length 6356.1
  Top Layer w12: v1(5488.82,3800) 5488.82,3893.82 5530,3935 5595,3935 5644.58,3885.42 5682.69,3885.42 D1.2 5685,3886.89 v1(5685,3935.5) ; U3.2 U3.4 5821.97,3551.97 5880,3610 5880,3710 5840.55,3749.45 5840.55,3867.92 5955.42,3982.78 6002.22,3982.78 v1(6005,3980) 6177.58,3980 6195,3962.58 6195,3924.86 6175.14,3905 v1(6095,3905) 6095.3,3904.7 6095.3,3833.01 U5.20 6095.59,3815.96 6098.45,3813.11 6116.89,3813.11 6125,3805 6177.92,3805 6181.85,3808.93 6191.94,3808.93 v1(6195,3811.99) 6196.62,3810.37 6214.63,3810.37 6221.01,3803.99 6235,3790 6235,3750 6380,3605 6528.94,3605 6580,3656.06 D7.2 D6.2 D4.2 D3.2 D2.2 6580,4038.94 6637.65,4096.59 6637.65,4255.23 6592.87,4300 C8.2 6568.04,4316.96 6508.04,4316.96 v1(6490,4335) 6494.33,4335 6510.8,4351.47 6561.47,4351.47 C9.2 6592.87,4375 6616.4,4398.53 6616.4,4431.33 6745.07,4560 R9.2 ; U2.6 6036.68,4679.24 6036.68,4686.41 6047.29,4697.02 6076.77,4697.02 6098.79,4675 v1(6100,4675) ; U2.2 6059.41,4570.59 v1@6070,4560 ; v1(6184.7,4665.3) 6190,4660 6192.31,4660 MT1.12@6195.49,4663.19 ; MT1.8 6265.45,4686.65 6266.53,4687.73 6282.73,4687.73 v1(6285,4690) ; MT1.5@6274.12,4620 6281.06,4613.06 6286.94,4613.06 v1(6290,4610) v1@6280,4610
  Bottom Layer w12: v1(5685,3935.5) 5685,3937.26 5596.51,4025.75 5596.51,4208.49 5733.03,4345 5822.68,4345 v1(5824.88,4347.21) ; P1.1 5709.67,4724.67 5890.33,4724.67 R1.2 5944.5,4729.33 5977.54,4696.29 5977.54,4690.65 5993.19,4675 C4.1 C3.1 v1(6100,4675) 6138.95,4675 6151.05,4687.1 6200.59,4687.1 6202.69,4685 6204.79,4687.1 6272.9,4687.1 C5.2@6275,4685 ; v1@5825,4345 5860,4345 5890.67,4375.67 R2.2@5890.67,4415.24 ; R2.2 R2.2@5890.67,4415.24 ; v1(6005,3980) 6044.18,4019.18 6044.18,4155.35 6037.24,4162.28 v1(6037.24,4166.61) ; v1(6073.36,4556.85) 6073.36,4520.73 6149.33,4444.76 R3.2@6149.33,4444.11 ; v1(6285,4690) C5.2 6290,4670 v1(6290,4610) C7.1 6290,4570.67 6174.17,4454.84 6160.06,4454.84 R3.2@6149.33,4444.11 ; R2.2@5890.67,4415.24 5901.4,4404.5 5921.44,4404.5 5973.98,4351.97 L1.2 6028.78,4350 6108.78,4430 R3.2 R3.2@6149.33,4444.11
5V0: C10.2 C12.2 P2.1 U3.3 U4.3 | length 1342.5
  Top Layer w12: v1(5395.16,3922.01) 5399.45,3917.72 v1(5399.45,3798.03) 5399.45,3781.3 5345,3726.85 5345,3580 5425,3500 6090,3500 P2.1
AREF: C2.1 U1.20 | length 86.9
  Top Layer w12: U1.20 6168.15,4314.25 6189.43,4335.53 6209.35,4335.53 C2.1
AVCC: C1.2 L1.1 U1.18 | length 157.8
  Top Layer w12: v1@6091.18,4260 6095.51,4260 6104.25,4251.26 U1.18
  Bottom Layer w12: C1.2@6091.18,4260 6091.18,4345.16 L1.1
  other v1: 6091.18,4270
GND: C1.1 C2.2 C3.2 C4.2 C5.1 C6.1 C7.2 C8.1 C9.1 C10.1 C11.1 C12.1 C13.1 C14.2 J1.6 J1.10 J1.11 J1.12 J1.13 J1.14 J2.2 MT1.1 MT1.4 MT1.6 P1.4 P2.6 pad.7 SW1.2 SW2.5 SW2.6 SW2.7 SW2.8 SW3.L2 SW4.L2 U1.5 U1.21 U2.1 U2.5 U2.7 U3.1 U4.2 U5.1 U5.10 U5.11 U5.12 U5.13 U5.16 U5.17 | length 1249.4
  Top Layer w12: v1(5430.3,4400.3) v1(5430.3,4550.3) ; v1(5729.7,4066.24) 5736.93,4066.24 5745,4058.17 v1(5745,3910) ; v1(5800,3945) 5800,4010 v1(5855,4065) U5.10 ; v1(5850,4800) 5853.06,4796.94 5878.06,4796.94 5895,4780 SW1.2 ; U5.11 U5.12 U5.13 ; U5.16 5995.65,3830.3 v1(6004.7,3830.3) U5.17@6016.4,3830.3 ; v1(6010,4720) 6009.11,4719.11 6009.11,4677.26 U2.5 6011.09,4673.52 6011.09,4666.35 6021.7,4655.73 6045.94,4655.73 6056.55,4666.35 6056.55,4673.52 U2.7 ; U5.17@6017.61,3831.51 U5.17@6016.4,3830.3 ; U5.17 U5.17@6016.4,3830.3 ; U2.1 6085,4599.21 6087.86,4596.35 6088.65,4596.35 6091.94,4593.06 6101.94,4593.06 v1(6105,4590) ; U5.1 6095.89,4065.3 v1(6104.7,4065.3) ; MT1.1 6206.4,4591.65 6205.32,4590.57 6189.9,4590.57 6184.33,4585 v1(6180,4585) 6183.06,4581.94 6208.23,4581.94 6216.61,4573.57 6255.25,4573.57 6264.37,4582.7 6264.37,4592.84 MT1.4 ; MT1.6@6280,4639.69 6349.69,4639.69 v1@6350,4640 ; v1(6798.5,4105.75) 6798.5,4071.5 v1(6860,4010) ; v1(6855.06,4118.54) 6920,4053.6 v1(6920,4020)
  other v1: 5580.26,3798.33 5890.57,3833.01 6154,4009.82 5274.7,4155.3 5330,4155 6585,4181.89 5304.7,4184.11 5331.21,4209.44 5274.7,4210.3 6224.7,4249.11 5826.61,4314.25 6153.09,4346.04 6585,4493.11 6349.39,4639.98
MISO: P2.5 R7.2 U1.16 | length 1029.8
  Top Layer w12: U1.16 6263.46,4166.61 v1(6316.85,4220)
  Bottom Layer w12: P2.5 5820.24,3649.76 5820.24,3672.28 5820,3672.53 5820,3880 5945,4005 5995,4005 6020,4030 6020,4136.06 6005.89,4150.17 6005.89,4188.89 6022.18,4205.18 6089.86,4205.18 6096.94,4198.1 6096.94,4183.06 v1(6100,4180)
MOSI: R8.2 U1.15 U5.2 | length 364
  Top Layer w12: U1.15@6069.37,4151.85 6069.37,4065.63 U5.2 ; U1.15@6069.37,4165.98 U1.15 6068.74,4151.85 6090.57,4130.02 6302.54,4130.02 6312.52,4140 v1(6316.85,4140)
MOSI_5V: P2.2 U5.18 | length 228.2
  Top Layer w12: U5.18 6044.41,3725.59 P2.2
NetD1_1: D1.1 R4.2
  other v1: 5565,3885
NetD2_1: D2.1 R11.2
  other v1: 6460,4035
NetD3_1: D3.1 R12.2
  other v1: 6462.19,3959.7
NetD4_1: D4.1 R13.2
  other v1: 6462.19,3884.7
NetD5_1: D5.1 R14.2
  other v1: 6461.24,3809.7
NetD6_1: D6.1 R15.2
  other v1: 6462.19,3734.7
NetD7_1: D7.1 R16.2
  other v1: 6462.19,3659.7
NetR10_1: R10.1 SW4.COM U5.19 | length 240.4
  Top Layer w12: v1(6085,3780) 6085,3784.33 6072.86,3796.47 6072.86,3829.86 U5.19 6070,3915.36 6105.12,3950.47 SW4.COM
PB0: U1.12
PB1: U1.13
PB6: SW2.1 U1.7 | length 197.7
  Top Layer w12: SW2.1 5729.41,4333.7 5811.85,4251.26 U1.7
PB7: SW3.COM U1.8 | length 148
  Top Layer w12: SW3.COM 5737.87,4125 5745.65,4132.78 5745.65,4153.57 5811.85,4219.76 U1.8
PC0: R11.1 U1.23 | length 1134.3
  Top Layer w12: U1.23 6318.74,4408.74 6515,4605 6615,4605 v1@6635,4585
  Bottom Layer w12: R11.1@6564.33,4060.5 6579.91,4060.5 6634.7,4115.3 v1(6634.7,4585.3)
PC1: R12.1 U1.24 | length 1296
  Top Layer w12: U1.24 6315.24,4440.24 6500,4625 6645,4625 v1@6655,4615
  Bottom Layer w12: R12.1 6564.77,3959.56 6592.03,3959.56 6659.7,4027.23 6659.7,4595.65 6657.77,4597.59 6657.77,4612.23 v1(6654.7,4615.3)
PC2: R13.1 U1.25 | length 1580.6
  Top Layer w12: U1.25 6103.39,4496.54 6103.39,4511.3 6131.65,4539.57 6344.57,4539.57 6475,4670 6645,4670 v1@6655,4680
  Bottom Layer w12: R13.1 6564.33,3891.3 6575.06,3902.03 6592.03,3902.03 6707.29,4017.29 6707.29,4077.71 6772.1,4142.53 6772.1,4545.31 6768.54,4548.87 6768.54,4566.46 v1(6654.7,4680.3)
PC3: R14.1 U1.26 | length 1878.9
  Top Layer w12: U1.26 6068.74,4508.15 6117.16,4556.57 6331.57,4556.57 6465,4690 6620,4690 v1@6640,4710
  Bottom Layer w12: R14.1 6564.33,3822.34 6575.06,3833.07 6590.95,3833.07 6827.88,4070 6880,4070 6910,4100 6910,4180 6830,4260 6830,4515 6795.53,4549.47 6791.98,4549.47 6785.54,4555.92 6785.54,4584.82 6663.12,4707.23 6642.77,4707.23 v1(6639.7,4710.3)
PD2: SW2.4 U1.32 | length 173.8
  Top Layer w12: SW2.4 5779.07,4550 5835.68,4493.39 U1.32
PD3: SW2.3 U1.1 | length 141.4
  Top Layer w12: SW2.3 5800,4500 5826.61,4473.39 U1.1
PD4: SW2.2 U1.2 | length 114.3
  Top Layer w12: SW2.2 5739.45,4450 5780.71,4408.74 U1.2
PD5: R4.1 U1.9 | length 393.2
  Top Layer w12: v1(5798.81,4085) 5803.14,4085 5823.03,4104.88 5843.54,4104.88 v1(5846.6,4107.94) ; U1.9 5882.94,4163.44 v1(5882.94,4142.42)
  Bottom Layer w12: R4.1 5672.17,3899.76 5682.9,3910.5 5695.36,3910.5 5796.6,4011.74 5796.6,4082.79 v1(5798.81,4085) ; v1(5846.6,4107.94) 5847.53,4107.94 5882.01,4142.42 v1(5882.94,4142.42)
PD6: U1.10
PD7: U1.11
PE0: R15.1 U1.3 | length 1935.7
  Top Layer w12: v1@5772.99,3579.11 5773.81,3579.93 5773.81,4105.02 5774.98,4106.18 5774.98,4116.99 v1(5778.04,4120.05) ; U1.3 5841.38,4377.24 5870,4348.62 5870,4256.08 v1(5870.95,4255.12)
  Bottom Layer w12: v1(5773.81,3578.29) 5797.1,3555 6575,3555 6635,3615 6635,3705 6605,3735 R15.1 ; v1(5778.04,4120.05) 5780.05,4120.05 5870.95,4210.95 v1(5870.95,4255.12)
PE1: J1.9 R9.1 U1.6 | length 1325.7
  Top Layer w12: v1(6044.7,4330.3) 6088.67,4374.26 6088.67,4421.16 6129.58,4462.06 6302.06,4462.06 6490,4650 6846.93,4650 6922.17,4574.76 R9.1 v1(6920,4560)
  Bottom Layer w12: v1(5825,4281.09) 5887.71,4281.09 5921.62,4315 5980,4315 5980.38,4315.38 6030.38,4315.38 v1@6045,4330
PE2: R16.1 U1.19 | length 1782.8
  Top Layer w12: v1@5915,4220 5990,4295 6101.54,4295 6113.78,4282.76 U1.19
  Bottom Layer w12: v1(5914.7,4220.3) 5815,4120.59 5815,4104.17 5825,4094.17 5825,3915 5786.89,3876.89 5786.89,3613.11 5815,3585 6525,3585 6557.53,3617.53 6557.53,3647.53 R16.1@6567.53,3657.53
PE3: R6.2 U1.22 | length 167.8
  Top Layer w12: U1.22 6155.23,4379.09 6182.24,4379.09 6186.98,4383.83 6308.69,4383.83 6312.52,4380 v1(6316.85,4380)
RESET: R1.1 SW1.1 U1.29 U5.6 | length 740.6
  Top Layer w12: v1(5895,4608.07) 5912.72,4608.07 5974.25,4546.54 U1.29 5974.25,4476.02 5965,4466.77 5965,4445 5930,4410 5930,4277.52 5857.94,4205.46 5857.94,4132.06 5885,4105 5957.75,4105 5964.78,4097.97 5964.78,4070.72 U5.6@5970.5,4065
  Bottom Layer w12: v1(5895,4608.07) R1.1
RESET_5V: P2.4 U5.14 | length 199
  Top Layer w12: P2.4 5939.76,3649.76 5939.76,3669.92 5942.37,3672.53 U5.14@5942.37,3833.92
RX: P1.2 U1.30 | length 439.9
  Top Layer w12: P1.2 5655,4670 5715,4670 5815,4570 5880.28,4570 5942.76,4507.52 U1.30
SCK: R5.2 U1.17 U5.5 | length 552.6
  Top Layer w12: v1(5990,4115) 5991.61,4113.39 5991.61,4069.47 U5.5@5996.09,4065 ; v1(5990,4217.54) 5994.33,4217.54 6000.84,4224.04 6127.52,4224.04 6129.95,4221.61 6151.54,4221.61 6155.23,4217.92 6185.23,4217.92 6186.98,4216.17 6263.02,4216.17 6280,4233.14 6280,4263.15 v1(6316.85,4300)
  Bottom Layer w12: v1(5990,4115) 5975,4130.03 5975,4202.51 v1(5990,4217.54)
SCK_5V: P2.3 U5.15 | length 217.8
  Top Layer w12: U5.15@5967.6,3831.92 5967.6,3702.4 P2.3
SCL: MT1.13 R2.1 U1.28 U2.4 | length 390.4
  Top Layer w12: v1(5995,4430) 5995,4434.33 6005.75,4445.08 U1.28 6006.99,4494.63 6006.99,4598.76 6008.48,4600.26 6008.48,4619.25 6027.75,4638.51 6191.52,4638.51 6192.61,4639.61 MT1.13@6195.65,4639.61
SD_CLK: J1.5 R5.1 | length 74.2
  Bottom Layer w12: R5.1 6430.39,4292.76 J1.5
SD_CMD: J1.3 R6.1 | length 71.5
  Bottom Layer w12: R6.1 6423.78,4379.37 J1.3
SD_DAT0: J1.7 R7.1 | length 77.6
  Bottom Layer w12: R7.1 6423.15,4218.84 6435.85,4206.14 J1.7
SD_DAT1: J1.8 R8.1 | length 86.6
  Bottom Layer w12: R8.1 6423.15,4150.13 6435.85,4162.83 J1.8
SDA: MT1.14 R3.1 U1.27 U2.3 | length 350.5
  Top Layer w12: v1(6045,4430) 6045,4434.33 6037.24,4442.09 U1.27 6035.53,4495.1 6035.53,4598.29 U2.3 6036.68,4602.86 6036.68,4609.68 6039.55,4612.55 6039.55,4612.9 6047.29,4620.65 6097.12,4620.65 6097.76,4620 MT1.14@6196.65,4620
TX: P1.3 U1.31 | length 508.4
  Top Layer w12: P1.3 5575,4650 5705.1,4650 5805.1,4550 5868.78,4550 5911.26,4507.52 U1.31
VIN: C13.2 J2.1 U4.1 | length 231.4
  Top Layer w12: J2.1 5209.43,3734.43 5209.43,3916.6 v1(5214.84,3922.01)
pads on no net: J1.1 J1.2 MT1.2 MT1.3 MT1.7 MT1.9 MT1.10 MT1.11 SW1. SW3.L1 SW3.M1 SW3.M2 SW3.M3 SW3.M4 SW3.M5 SW3.M6 SW4.L1 SW4.M1 SW4.M2 SW4.M3 SW4.M4 SW4.M5 SW4.M6 U5.3 U5.4 U5.7 U5.8 U5.9

## Polygon pours and split planes (outlines as drawn)
GND on Bottom Layer "GND_L02_P000" (solid, pour order 0): 4980,4855 7025,4855 7025,3350 7020,3345 4980,3345

## Silkscreen, mask and mechanical layers (free items; w line width, h text height)
Top Overlay:
  text "3V3" at 5671.68,4791 h25
  text "GND" at 5371.68,4786 h25
  text "TX" at 5484.17,4786 h25
  text "RX" at 5584.17,4786 h25
  text "RST" at 5861.68,4766 h25
  text "ACCEL" at 6176.69,4711 h25
  text "UART" at 5242.36,4707.5 h25
  text "ALTIM" at 5993.77,4706 h25
  text "ON" at 5494.17,4621 h25
  text "OFF" at 5611.68,4621 h25
  text "ALTIMETER" at 5176.57,4537.5 h25
  text "ACCELEROMETER" at 5072.44,4487.5 h25
  text "SAVE TO SD" at 5147.41,4437.5 h25
  text "OUTPUT TO UART" at 5047.44,4387.5 h25
  text "PROG ENA" at 6139.2,4101 h25
  text "ON" at 5537.35,4097.5 h25
  text "OUTPUT TO UART" at 6621,4022.5 h25
  text "ON" at 6302.35,3952.5 h25
  text "SAVE TO SD" at 6621,3947.5 h25
  text "IND ENA" at 5568.78,3946 h25
  text "ACCEL ENABLE" at 6621,3872.5 h25
  text "VIN" at 5086.26,3822.51 h35
  text "BUILTIN" at 5645.86,3816 h25
  text "ALTIM ENABLE" at 6621,3797.5 h25
  text "IND ENABLED" at 6621,3722.5 h25
  text "PROGRAMMING" at 5848.79,3706 h25
  text "SD DETECTED" at 6621,3647.5 h25
  text "GND" at 5696.68,3544.01 h25
  text "MISO" at 5786.26,3544.01 h25
  text "RST" at 5896.68,3544.01 h25
  text "SCK" at 5996.68,3544.01 h25
  text "MOSI" at 6088.35,3544.01 h25
  text "5V0" at 6196.68,3544.01 h25
  text "GND" at 5358.35,3402.51 h35
Bottom Overlay:
  text "Designed by:" at 6817,3525 h30
  text "Nicholas Niles" at 6815,3447.51 h45
  text "https://nicholasniles.com/" at 6819,3396.67 h25
Mechanical 1:
  the board outline again, w10